# Altium PCB PCB2.PcbDoc
Units mil, origin at the board's own origin, x right, y up, seen from the top; angles counter-clockwise.
Board outline 6000 x 4000 mil, 2 copper layers (Top Layer, Bottom Layer); 6 components, 30 nets, 76 pads, 0 vias.
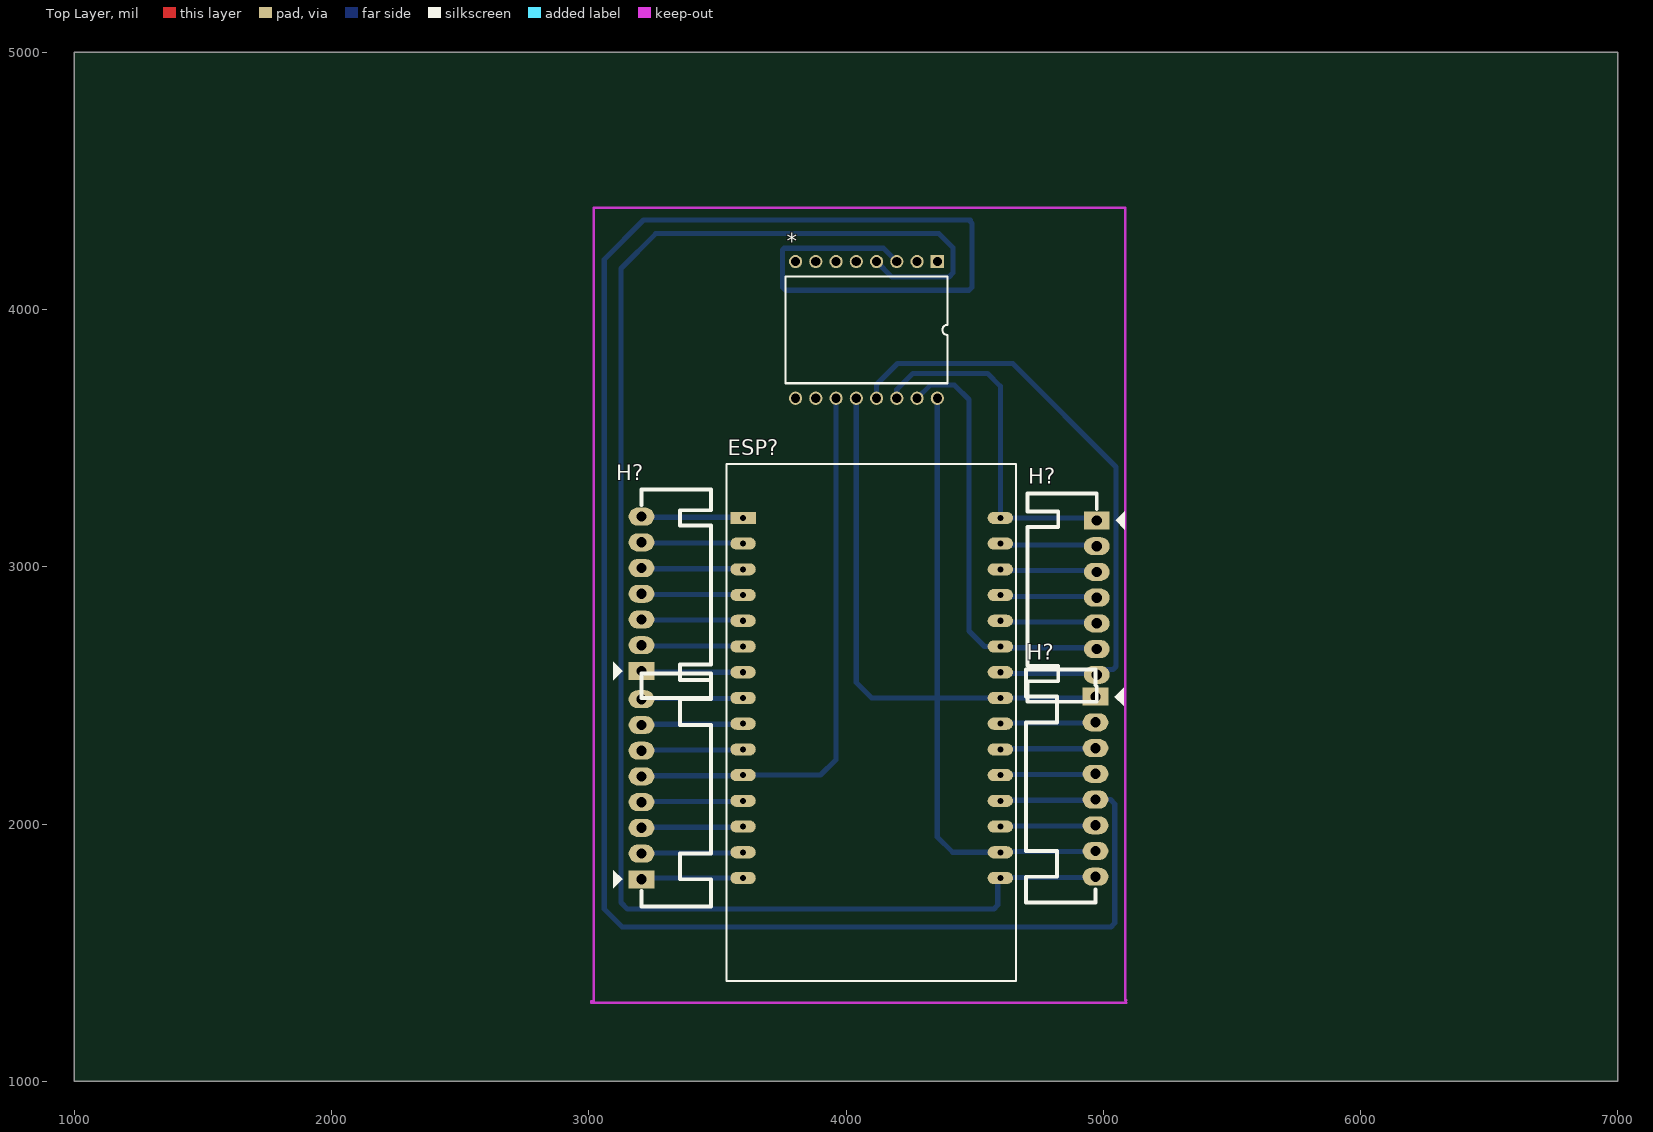
[diagram p0: Top Layer view]
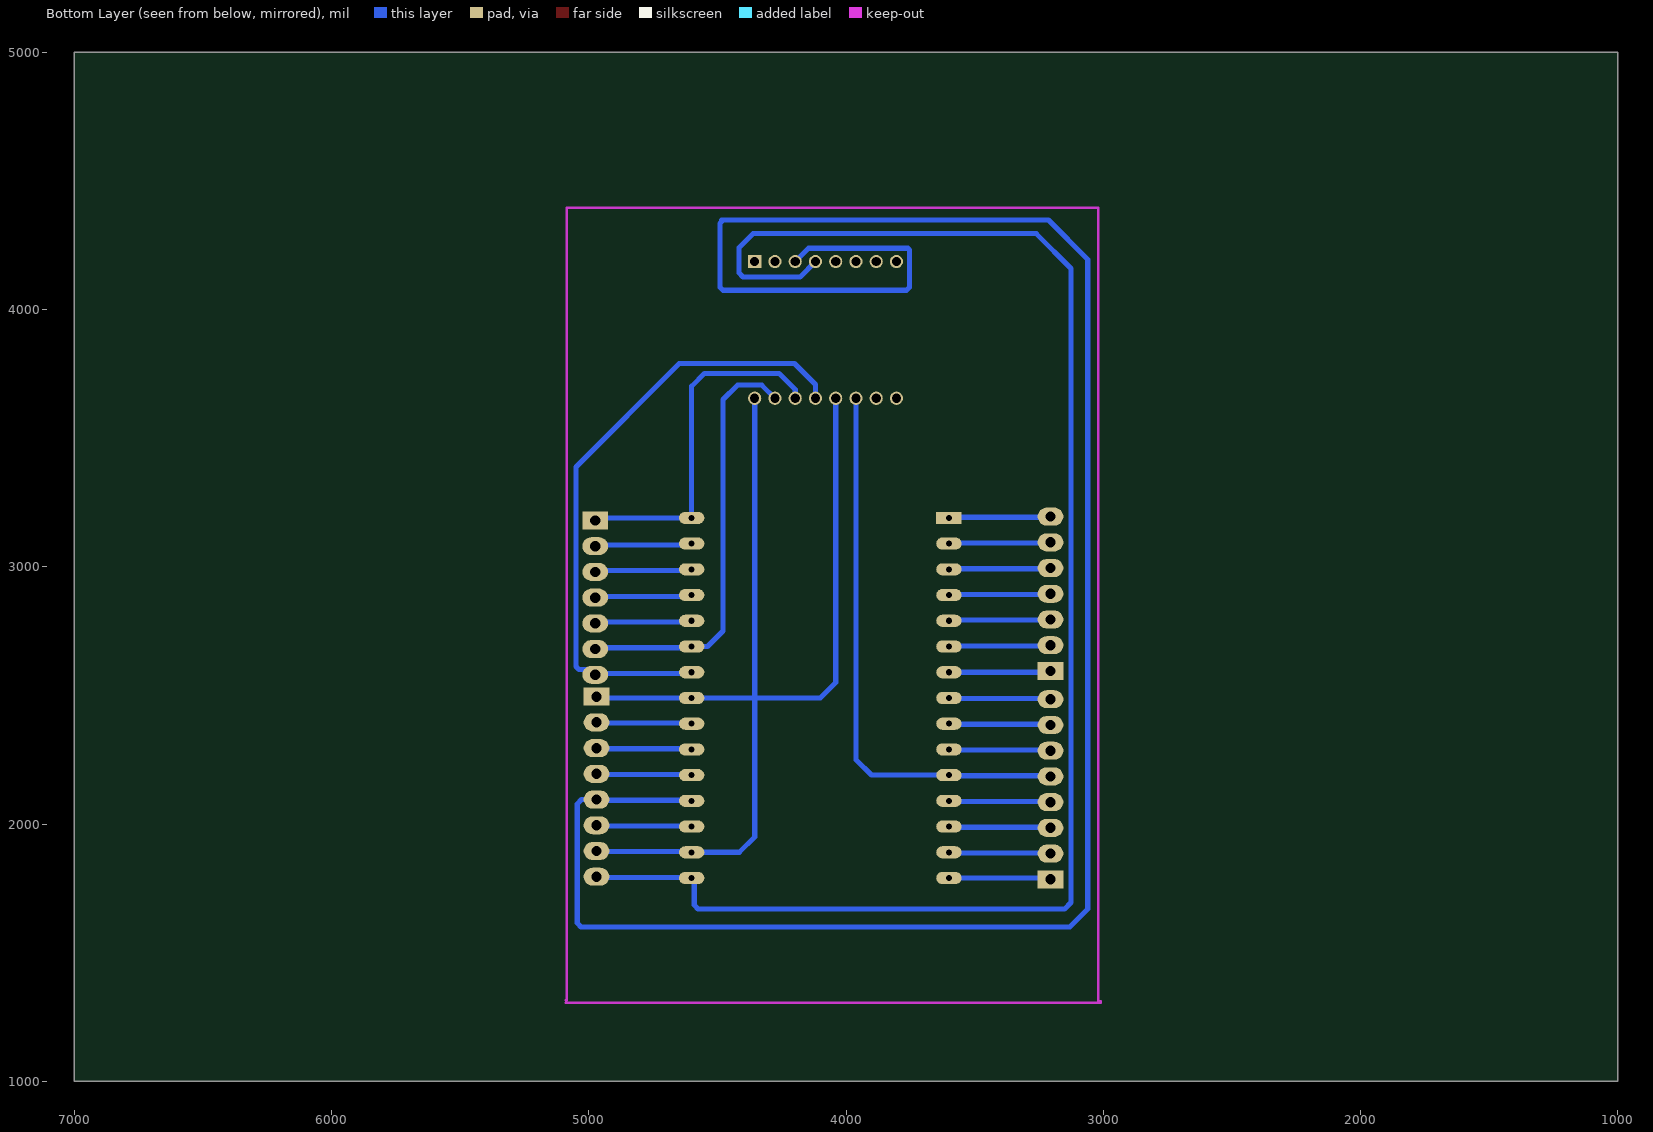
[diagram p1: Bottom Layer view, seen from below]
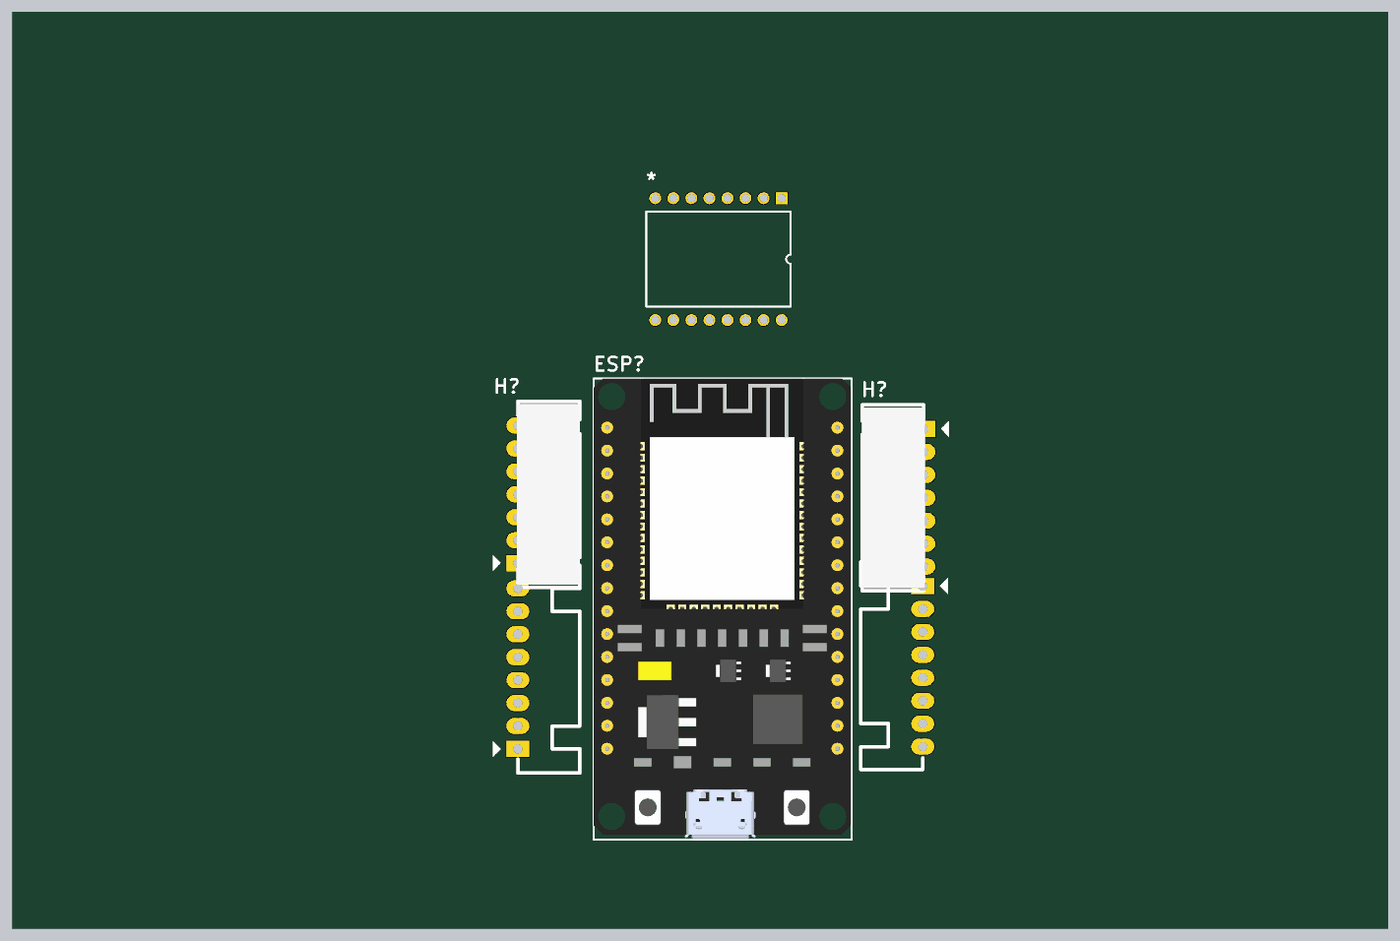
[diagram p2: 3D render of the assembled board from above, using the file's embedded part models]

## Layer stack, top to bottom
Top Solder: solder mask 0.4, Solder Resist, Dk 3.5
Top Layer: signal copper 1.4
Dielectric 1: dielectric 12.6, FR-4, Dk 4.8
Bottom Layer: signal copper 1.4
Bottom Solder: solder mask 0.4, Solder Resist, Dk 3.5

## Board outline
1000,1000 7000,1000 7000,5000 1000,5000

## Design rules (kind name [scope] priority, off if disabled: settings)
Clearance [All] p1: gap=15 ignorepadtopadclearanceinfootprint=FALSE
PolygonConnect [All] p1: connectstyle=Relief reliefconductorwidth=10 reliefentries=4 polygonreliefangle="90 Angle" airgapwidth=10
RoutingLayers [All] p1: top layer_v5=FALSE bottom layer_v5=TRUE
RoutingVias [All] p1: holewidth=28 width=35 viastyle="Through Hole" minholewidth=28 minwidth=0 maxholewidth=28 maxwidth=50
SolderMaskExpansion [All] p1: expansion=4 istentingtop=FALSE
Width [All] p1: maxlimit=50 minlimit=10 preferedwidth=20 toplayer_maxwidth=10 toplayer_prefwidth=10 minimp=50.000000 maximp=50.000000 favimp=50.000000
29 further rules are at their usual default settings.

## Classes and differential pairs
component class Sheet2: " " * ESP? H?

## Components (designator, comment, footprint, x,y, rotation, side; value= is the part's Value field where it differs from the comment)
* "Component_1" "DIP16 - duplicate" 4354.96,4186.5 r270 top
ESP? "ESP32 DEVKIT" "ESP32 WROOM 32 KIT" 3600,3190 r0 top
H? "Header 8P 2.54 Duc Cong" "Header 8P DC 2.54" 4970,2495 r180 top
H? "Header 7P 2.54 Duc Cong" "Header 7P DC 2.54" 3205,2594.96 r0 top
H? "Header 7P 2.54 Duc Cong" "Header 7P DC 2.54" 4975,3180.04 r180 top
? "Header 8P 2.54 Duc Cong" "Header 8P DC 2.54" 3205,1785 r0 top

## Footprints (in the part's own frame and the unit in brackets; to place one, negate y for a bottom-side part, rotate by r counter-clockwise, add the part's x,y. Pads: shape width x height; smd on the part's side, far side on the other; paste and mask are expansions set on the pad)
"DIP16 - duplicate" [mm]
  rect 1.3x1.3 hole 0.9: 1(0,0)
  round 1.3 hole 0.9: 2(0,-2) 3(0,-4) 4(0,-6) 5(0,-8) 6(0,-10) 7(0,-12) 8(0,-14) 9(13.5,-14) 10(13.5,-12) 11(13.5,-10) 12(13.5,-8) 13(13.5,-6) 14(13.5,-4) 15(13.5,-2) 16(13.5,0)
  silkscreen extent 1.48,-15 12.02,1
"ESP32 WROOM 32 KIT" [mm]
  rect 2.5x1.2 hole 0.6: 1(0,0)
  oval 2.5x1.2 hole 0.6: 2(0,-2.54) 3(0,-5.08) 4(0,-7.62) 5(0,-10.16) 6(0,-12.7) 7(0,-15.24) 8(0,-17.78) 9(0,-20.32) 10(0,-22.86) 11(0,-25.4) 12(0,-27.94) 13(0,-30.48) 14(0,-33.02) 15(0,-35.56) 16(25.4,-35.56) 17(25.4,-33.02) 18(25.4,-30.48) 19(25.4,-27.94) 20(25.4,-25.4) 21(25.4,-22.86) 22(25.4,-20.32) 23(25.4,-17.78) 24(25.4,-15.24) 25(25.4,-12.7) 26(25.4,-10.16) 27(25.4,-7.62) 28(25.4,-5.08) 29(25.4,-2.54) 30(25.4,0)
  silkscreen extent -1.65,-45.72 26.92,5.33, body extent -1.65,-45.6 26.85,5.33, height 10.49
"Header 7P DC 2.54" [mil]
  rect 100x70 hole 40: 1(0,0.04)
  oval 100x70 hole 40: 2(0,100.04) 3(0,200.04) 4(0,300.04) 5(0,400.04) 6(0,500.04) 7(0,600.04)
  silkscreen extent -110,-105 270,705, body extent -5,-94 271,694, height 237
"Header 8P DC 2.54" [mil]
  rect 100x70 hole 40: 1(0,0)
  oval 100x70 hole 40: 2(0,100) 3(0,200) 4(0,300) 5(0,400) 6(0,500) 7(0,600) 8(0,700)
  silkscreen extent -110,-105 270,800

## Part data
ESP?: library part "ESP32 WROOM 32 KIT"
H? H? H? ?: "Cắm", Chung_Loai=Cắm, Don_Vi=Con
  H? ?: Ma_Hang=MH003367, Ten_Linh_Kien="Header 8P XH2.54-8P Đực Cong"
  H? H?: Ma_Hang=MH004118, Ten_Linh_Kien="Header 7P XH2.54-7P Đực Cong"

## Nets (pads, with @x,y where several pads share a name; then routed paths per layer and width w, separated by ;. In a path a pad name is that pad's centre, name@x,y a point inside that pad or via, vN(x,y) a via of type N, cw(c..) or ccw(c..) an arc to the next point about the centre after c; other vN are vias at no path point)
"Net _1": ?.1 ESP?.15 | length 397.1
  Bottom Layer w20: ?.1 3210,1790 ESP?.15
"Net _2": ?.2 ESP?.14 | length 397.1
  Bottom Layer w20: ?.2 3207.5,1887.5 3597.5,1887.5 ESP?.14
"Net _3": ?.3 ESP?.13 | length 397.1
  Bottom Layer w20: ?.3 3207.5,1987.5 3597.5,1987.5 ESP?.13
"Net _4": ?.4 ESP?.12 | length 397.1
  Bottom Layer w20: ?.4 3207.5,2087.5 3597.5,2087.5 ESP?.12
"Net _5": *.11 ?.5 ESP?.11 | length 2188.2
  Bottom Layer w20: ?.5 3207.5,2187.5 3597.5,2187.5 ESP?.11 3901.26,2190 3961.26,2250 *.11
"Net _6": ?.6 ESP?.10 | length 397.1
  Bottom Layer w20: ?.6 3207.5,2287.5 3597.5,2287.5 ESP?.10
"Net _7": ?.7 ESP?.9 | length 397.1
  Bottom Layer w20: ?.7 3207.5,2387.5 3597.5,2387.5 ESP?.9
"Net _8": ?.8 ESP?.8 | length 397.1
  Bottom Layer w20: ?.8 3207.5,2487.5 3597.5,2487.5 ESP?.8
Net*_3: *.3 ESP?.19 H?.5@4970,2095 | length 8573.2
  Bottom Layer w20: *.3 4145.98,4238 3760,4238 3753,4231 3753,4086.72 3764.72,4075 4478.28,4075 4490,4086.72 4490,4335 4483.28,4341.72 4483.28,4348.28 3213.28,4348.28 3060,4195 3060,1670 3130,1600 5030,1600 5045,1615 5045,2078 5028,2095 4970,2095 4967.5,2092.5 4602.5,2092.5 ESP?.19
Net*_4: *.4 ESP?.16 H?.8 | length 6223
  Bottom Layer w20: *.4 4178.24,4127 4400,4127 4416,4143 4416,4240 4361,4295 3260,4295 3125,4160 3125,1695 3150,1670 4575,1670 4590,1685 4590,1780 ESP?.16 4602.5,1792.5 4967.5,1792.5 H?.8
Net*_12: *.12 ESP?.23 H?.1@4970,2495 | length 2061.9
  Bottom Layer w20: *.12 4040,2550 4100,2490 ESP?.23 4965,2490 H?.1@4970,2495
Net*_13: *.13 ESP?.24 H?.7@4975,2580 | length 2420
  Bottom Layer w20: *.13 4118.74,3708.74 4200,3790 4648,3790 5050,3388 5050,2612.5 5037.5,2600 H?.7@4975,2600 ; ESP?.24 4605,2585 4970,2585 H?.7@4975,2580
Net*_14: *.14 ESP?.30 H?.1@4975,3180 | length 1374.5
  Bottom Layer w20: *.14 4197.48,3688.98 4260.5,3752 4550,3752 4600,3702 ESP?.30 4965,3190 H?.1@4975,3180
Net*_15: *.15 ESP?.25 H?.6@4975,2680 | length 1672.1
  Bottom Layer w20: *.15 4327.22,3706 4422,3706 4478,3650 4478,2750 4538,2690 ESP?.25 4605,2685 4970,2685 H?.6@4975,2680
Net*_16: *.16 ESP?.17 H?.7@4970,1895 | length 2347
  Bottom Layer w20: *.16 4354.96,1950 4414.96,1890 ESP?.17 4602.5,1892.5 4967.5,1892.5 H?.7@4970,1895
NetESP?_1: ESP?.1 H?.7@3205,3195 | length 397.1
  Bottom Layer w20: H?.7@3205,3195 3207.5,3192.5 3597.5,3192.5 ESP?.1
NetESP?_2: ESP?.2 H?.6@3205,3095 | length 397.1
  Bottom Layer w20: H?.6@3205,3095 3207.5,3092.5 3597.5,3092.5 ESP?.2
NetESP?_3: ESP?.3 H?.5@3205,2995 | length 397.1
  Bottom Layer w20: H?.5@3205,2995 3207.5,2992.5 3597.5,2992.5 ESP?.3
NetESP?_4: ESP?.4 H?.4@3205,2895 | length 397.1
  Bottom Layer w20: H?.4@3205,2895 3207.5,2892.5 3597.5,2892.5 ESP?.4
NetESP?_5: ESP?.5 H?.3@3205,2795 | length 397.1
  Bottom Layer w20: H?.3@3205,2795 3207.5,2792.5 3597.5,2792.5 ESP?.5
NetESP?_6: ESP?.6 H?.2@3205,2695 | length 397.1
  Bottom Layer w20: H?.2@3205,2695 3207.5,2692.5 3597.5,2692.5 ESP?.6
NetESP?_7: ESP?.7 H?.1@3205,2595 | length 397.1
  Bottom Layer w20: H?.1@3205,2595 3210,2590 ESP?.7
NetESP?_18: ESP?.18 H?.6@4970,1995 | length 372.1
  Bottom Layer w20: ESP?.18 4602.5,1992.5 4967.5,1992.5 H?.6@4970,1995
NetESP?_20: ESP?.20 H?.4@4970,2195 | length 372.1
  Bottom Layer w20: ESP?.20 4602.5,2192.5 4967.5,2192.5 H?.4@4970,2195
NetESP?_21: ESP?.21 H?.3@4970,2295 | length 372.1
  Bottom Layer w20: ESP?.21 4602.5,2292.5 4967.5,2292.5 H?.3@4970,2295
NetESP?_22: ESP?.22 H?.2@4970,2395 | length 372.1
  Bottom Layer w20: ESP?.22 4602.5,2392.5 4967.5,2392.5 H?.2@4970,2395
NetESP?_26: ESP?.26 H?.5@4975,2780 | length 379.1
  Bottom Layer w20: ESP?.26 4605,2785 4970,2785 H?.5@4975,2780
NetESP?_27: ESP?.27 H?.4@4975,2880 | length 379.1
  Bottom Layer w20: ESP?.27 4605,2885 4970,2885 H?.4@4975,2880
NetESP?_28: ESP?.28 H?.3@4975,2980 | length 379.1
  Bottom Layer w20: ESP?.28 4605,2985 4970,2985 H?.3@4975,2980
NetESP?_29: ESP?.29 H?.2@4975,3080 | length 379.1
  Bottom Layer w20: ESP?.29 4605,3085 4970,3085 H?.2@4975,3080
pads on no net: *.1 *.2 *.5 *.6 *.7 *.8 *.9 *.10

## Keep-outs
Keep-Out Layer:
  lines w10: 3010,1305 5090,1305 ; 3010,1310 3020,1310 3020,4390 ; 3020,4395 5085,4395 ; 5085,4390 5085,1315 5090,1315